# Altium PCB Relay PCB.PcbDoc
Units mm, origin at the board's own origin, x right, y up, seen from the top; angles counter-clockwise.
Board outline 141.46 x 161 mm, 4 copper layers (Top Layer, Signal Layer 1, Signal Layer 2, Bottom Layer), stack 0.778 mm thick; 27 components, 20 nets, 111 pads, 0 vias.
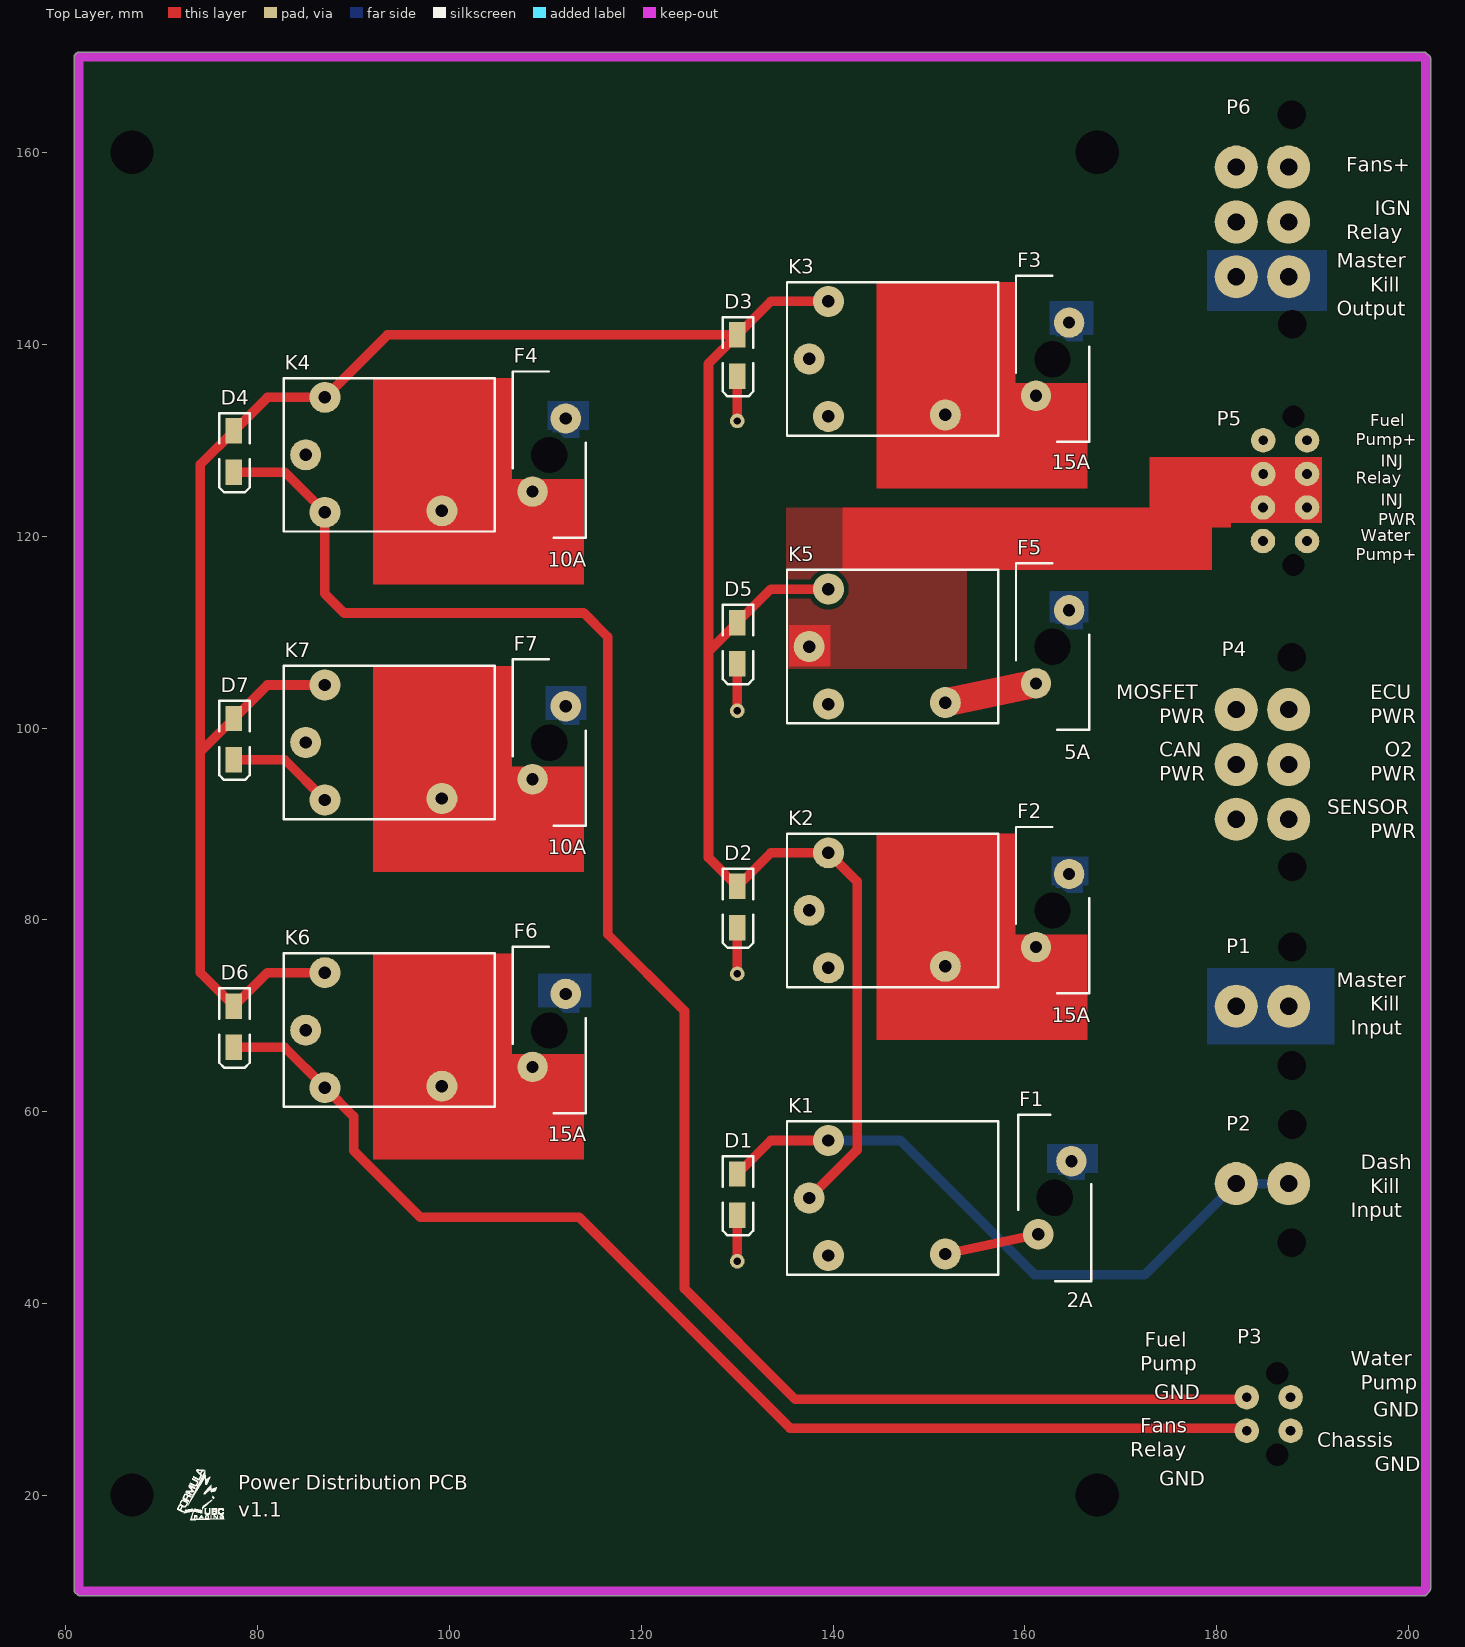
[diagram p0: Top Layer view]
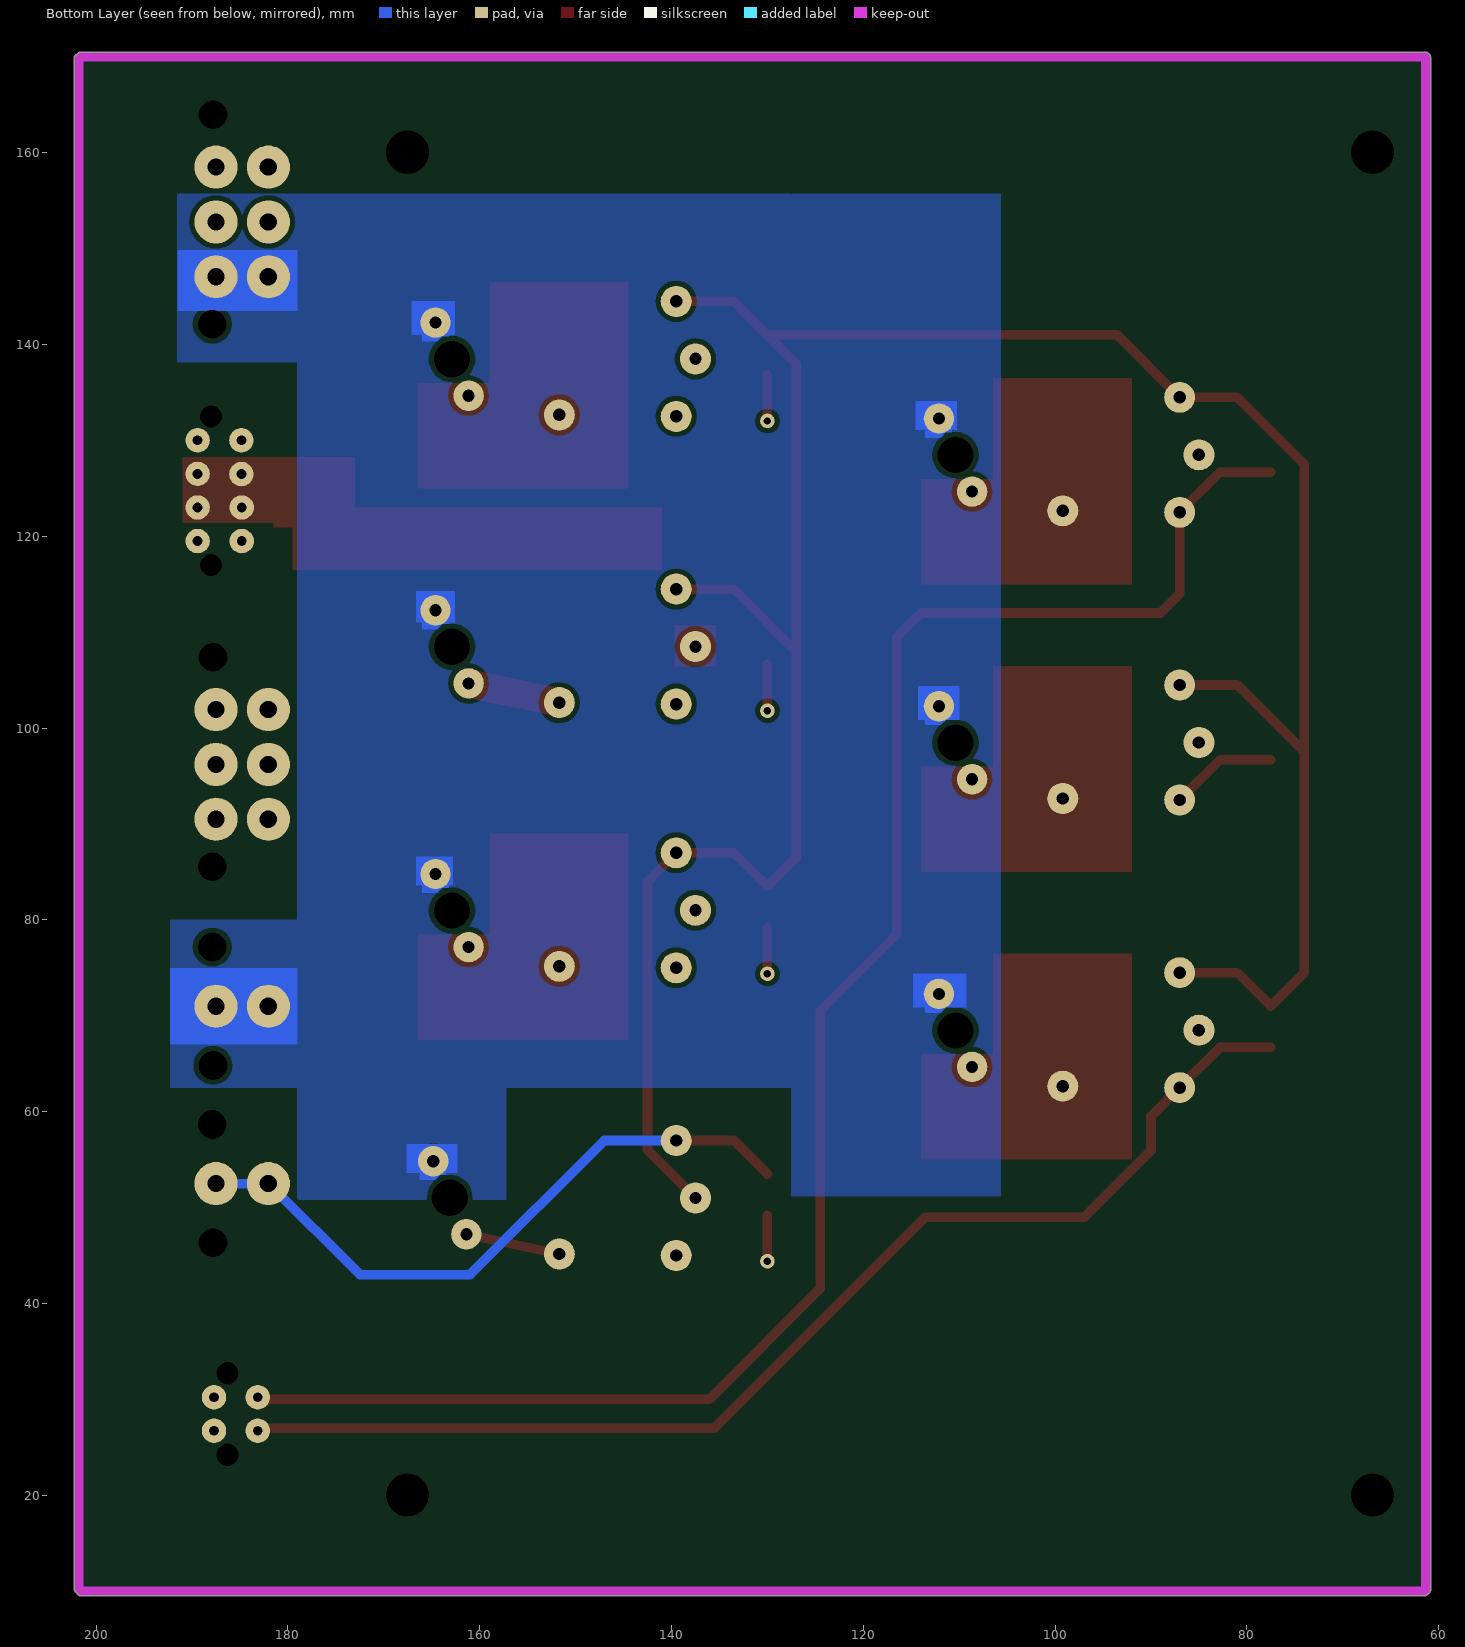
[diagram p1: Bottom Layer view, seen from below]
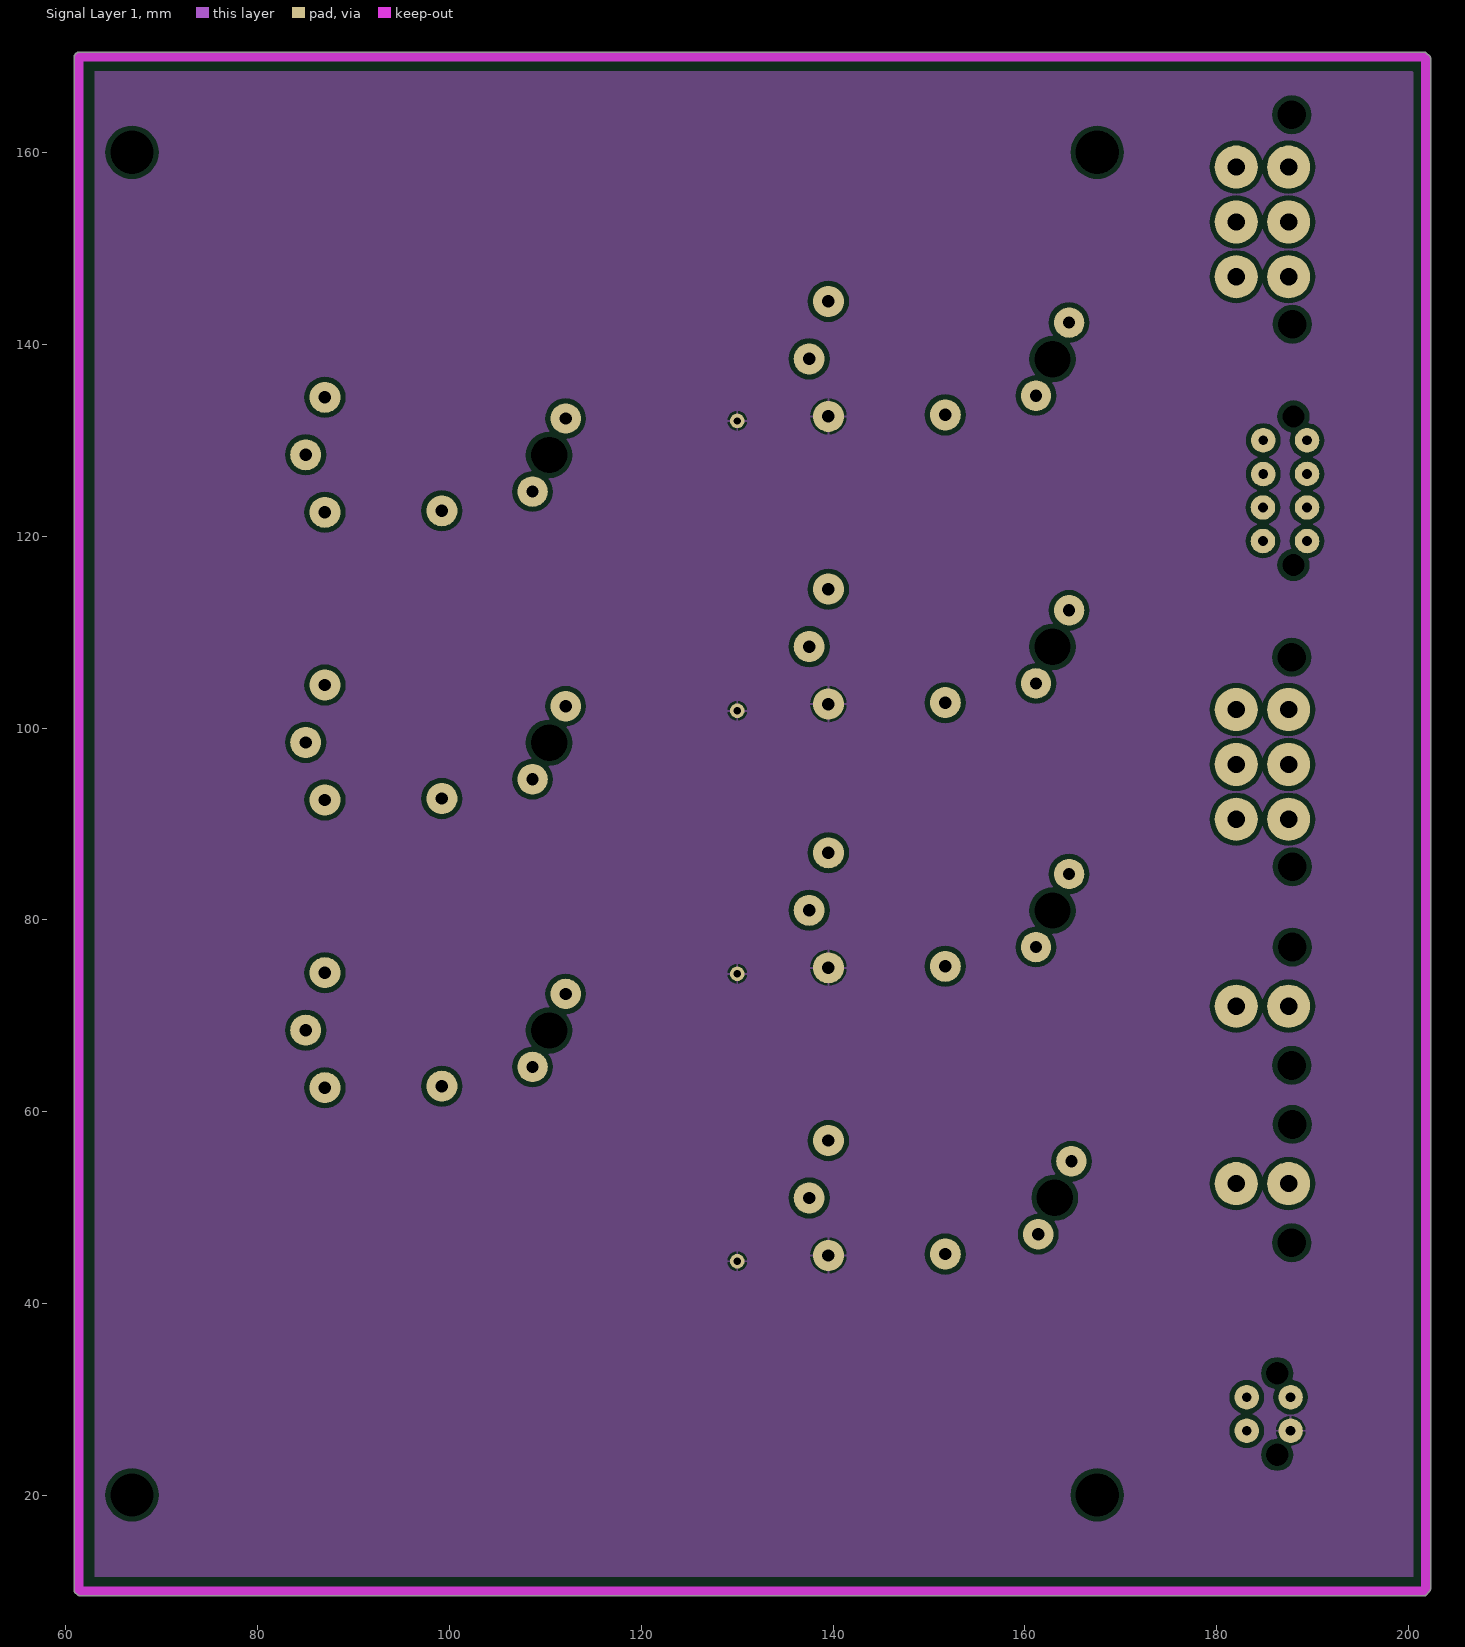
[diagram p2: Signal Layer 1]
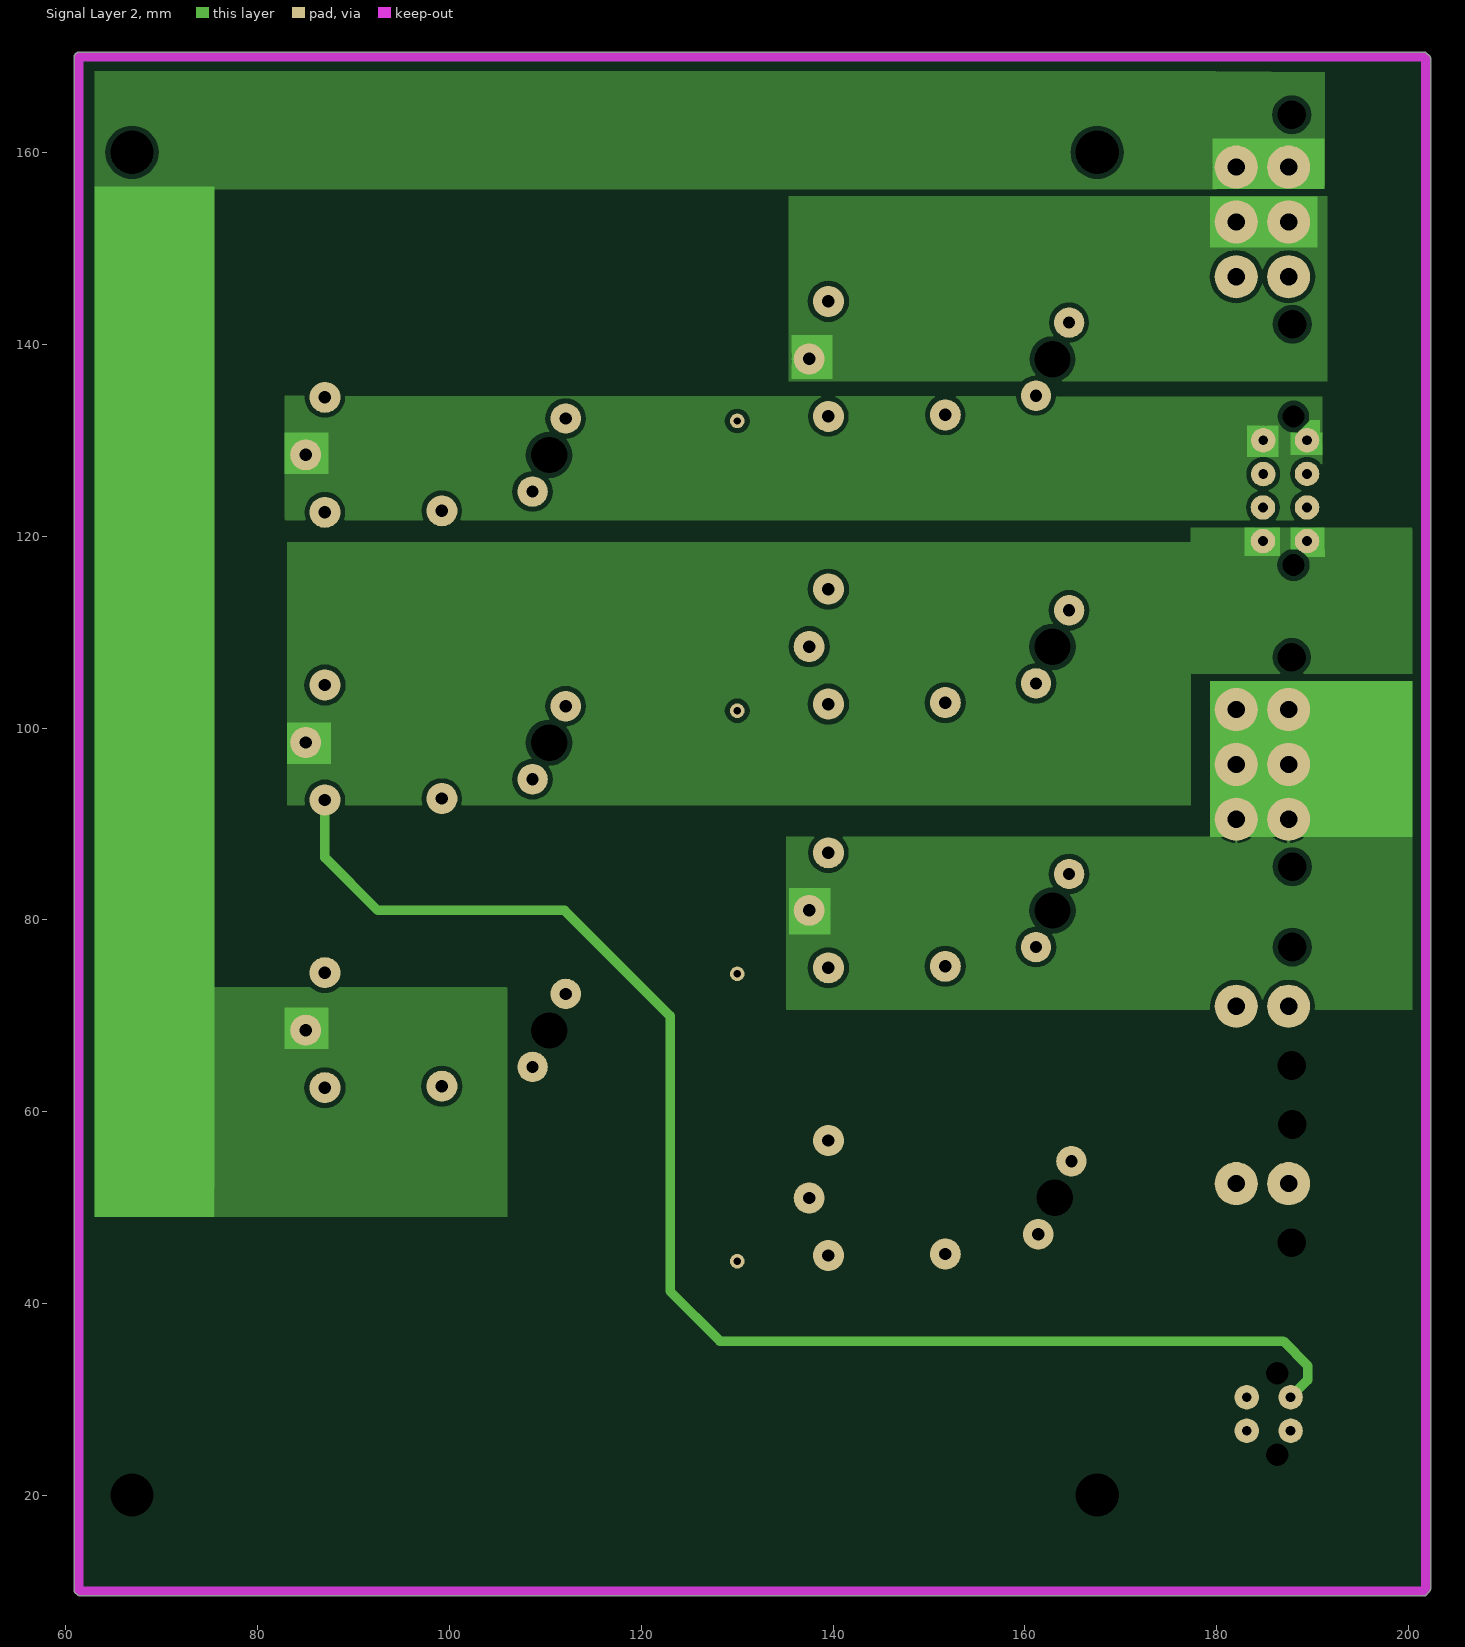
[diagram p3: Signal Layer 2]
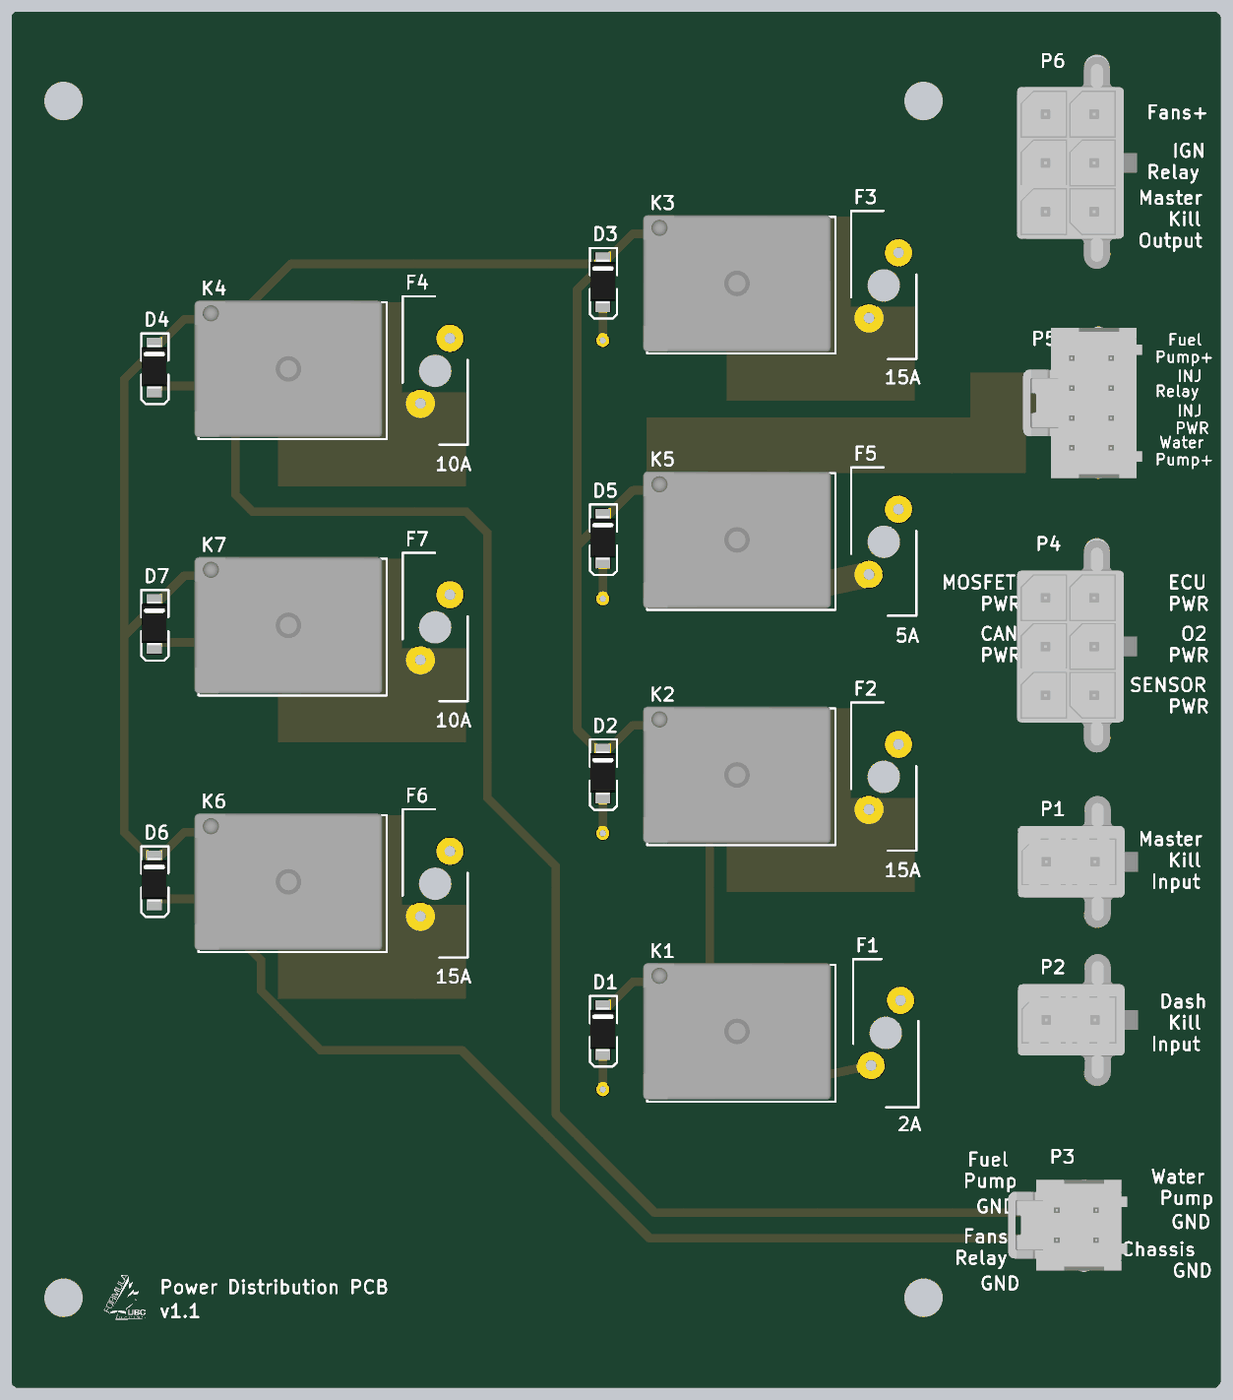
[diagram p4: 3D render of the assembled board from above, using the file's embedded part models]

## Layer stack, top to bottom
Top Solder: solder mask 0.0102, Solder Resist, Dk 3.5
Top Layer: signal copper 0.0356
Dielectric 1: core 0.254, FR-4, Dk 4.2
Signal Layer 1: signal copper 0.036
Dielectric 3: prepreg 0.127, Dk 4.2
Signal Layer 2: signal copper 0.036
Dielectric 2: core 0.254, Dk 4.2
Bottom Layer: signal copper 0.0356
Bottom Solder: solder mask 0.0102, Solder Resist, Dk 3.5

## Board outline
60.841,10.16 60.841,169.926 cw(c61.341,169.926) 61.026,170.315 cw(c61.415,170) 61.415,170.5 201.549,170.5 cw(c201.549,170) 201.97,170.271 cw(c201.803,169.799) 202.303,169.799 202.303,10.287 cw(c201.803,10.287) 202.022,9.837 cw(c201.549,10) 201.549,9.5 61.549,9.5 cw(c61.549,10) 61.151,9.697 cw(c61.341,10.16)

## Design rules (kind name [scope] priority, off if disabled: settings)
Clearance [All] p1: gap=0.254 except(0.508: Poly-Poly SMDPad-Poly Track-Poly Via-Poly Arc-Poly Fill-Poly THPad-Poly)
HoleSize [All] p1: absolutevalues=TRUE maxlimit=5 minlimit=0.025 maxpercent=80.000 minpercent=20.000
PolygonConnect [All] p1: connectstyle=Relief reliefconductorwidth=0.254 reliefentries=4 polygonreliefangle="90 Angle" airgapwidth=0.254
RoutingVias [All] p1: holewidth=0.711 width=1.27 viastyle="Through Hole" minholewidth=0.711 minwidth=1.27 maxholewidth=0.711 maxwidth=1.27
SolderMaskExpansion [All] p1: expansion=0.102
UnpouredPolygon [All] p1: allowunpoured=FALSE
Width [All] p1: maxlimit=16 minlimit=1 preferedwidth=1
28 further rules are at their usual default settings.

## Components (designator, comment, footprint, x,y, rotation, side; value= is the part's Value field where it differs from the comment)
D1 "" S1GDIODE 129.125,52.175 r270 top
D2 "" S1GDIODE 129.125,82.175 r270 top
D3 "" S1GDIODE 129.125,139.675 r270 top
D4 "" S1GDIODE 76.625,129.675 r270 top
D5 "" S1GDIODE 129.125,109.675 r270 top
D6 "" S1GDIODE 76.625,69.675 r270 top
D7 "" S1GDIODE 76.625,99.675 r270 top
F1 "2A" FUSEHOLDERV2 163.5,51 r0 top
F2 "15A" FUSEHOLDERV2 162.5,81 r180 top
F3 "15A" FUSEHOLDERV2 162.5,138.5 r180 top
F4 "10A" FUSEHOLDERV2 110,128.5 r180 top
F5 "5A" FUSEHOLDERV2 162.5,108.5 r180 top
F6 "15A" FUSEHOLDERV2 110,68.5 r180 top
F7 "10A" FUSEHOLDERV2 110,98.5 r180 top
K1 "MAIN RELAY" SPSTRELAYV2 141.894,51.076 r0 top
K2 "" SPSTRELAYV2 141.894,81.076 r0 top
K3 "" SPSTRELAYV2 141.894,138.576 r0 top
K4 "" SPSTRELAYV2 89.394,128.576 r0 top
K5 "" SPSTRELAYV2 141.894,108.576 r0 top
K6 "" SPSTRELAYV2 89.394,68.576 r0 top
K7 "" SPSTRELAYV2 89.394,98.576 r0 top
P1 "Relay Input Connector 1" 2PINCONNECTORV1 184.96,85.986 r270 top
P2 "Relay Input Connector 2" 2PINCONNECTORV1 184.96,67.486 r270 top
P3 "Relay Input Connector 3" 4PINULTRA 183.134,26.726 r90 top
P4 "Relay Output Connector (Mega)" 6PINCONNECTORV1 184.96,116.916 r270 top
P5 "Relay Output Connector (Ultra)" 8PINULTRA 189.42,119.506 r90 top
P6 "Relay Output Connector (Mega)" 6PINCONNECTORV1 184.96,173.486 r270 top

## Footprints (in the part's own frame and the unit in brackets; to place one, negate y for a bottom-side part, rotate by r counter-clockwise, add the part's x,y. Pads: shape width x height; smd on the part's side, far side on the other; paste and mask are expansions set on the pad)
2PINCONNECTORV1 [mm]
  round 4.5 hole 1.8: 1(14.986,2.54) 2(14.986,-2.921)
  round 0 hole 3: ""(8.816,2.921) ""(21.156,2.865)
  body extent 7.24,-6.38 22.63,7.65, height 15.15
4PINULTRA [mm]
  round 2.55 hole 1.02: 1(3.5,-4.572) 2(3.5,0) 3(0,-4.572) 4(0,0)
  round 0 hole 2.3: ""(-2.5,-3.175) ""(6,-3.175)
  body extent -3.49,-8.23 7.11,5.69, height 14.1
6PINCONNECTORV1 [mm]
  round 4.5 hole 1.8: 1(14.986,2.54) 2(14.986,-2.921) 3(20.701,2.54) 4(20.701,-2.921) 5(26.416,2.54) 6(26.416,-2.921)
  round 0 hole 3: ""(9.525,2.865) ""(31.369,2.921)
  body extent 8.29,-6.48 33.08,7.56, height 15.13
8PINULTRA [mm]
  round 2.55 hole 1.02: 1(0,0) 2(0,4.6) 3(3.5,0) 4(3.5,4.6) 5(7,0) 6(6.985,4.572) 7(10.5,0) 8(10.5,4.572)
  round 0 hole 2.3: ""(-2.5,1.42) ""(12.994,1.42)
  body extent -3.59,-3.68 14.01,10.23, height 13.1
FUSEHOLDERV2 [mil]
  round 125 hole 50: 1(53,151) 2(-83,-149)
  round 0 hole 149.02: ""(-15,1)
  silkscreen extent -165,-342 135,341, body extent -180,-340 140,340, height 502
S1GDIODE [mm] "Flyback diode"
  rect 2.65x1.75 smd: 1(2.975,0.875) 2(-1.325,0.875)
  silkscreen extent -3.18,-0.64 5.08,2.54, body extent -1.91,-0.57 3.37,2.35, height 2.41
SPSTRELAYV2 [mil]
  round 127.46 hole 51: 1(-173,-3) 2(386,-232.99) 3(-94,-239) 4(-94,233)
  silkscreen extent -264,-318 603,312, body extent -283,-310 583,320, height 630

## Part data
D1 D2 D3 D4 D5 D6 D7: library part Diode, "Default Diode"
F1 F2 F3 F4 F5 F6 F7: library part "Fuse 2", "Fuse"
K1 K2 K3 K4 K5 K6 K7: library part Relay-SPST, "Single-Pole Single-Throw Relay"
P1 P2: library part "Header 2", "Header, 2-Pin"
P3: library part "Header 4", "Header, 4-Pin"
P4 P6: library part "Header 6", "Header, 6-Pin"
P5: library part "Header 8", "Header, 8-Pin"

## Free pads (board coordinates)
  round 1.524 hole 0.762: 2(130,44.402) 2(130,74.374) 2(130,101.806) 2(130,132.032)
  round 0 hole 4.5: ""(66.888,20.044) ""(66.888,160.044) ""(167.538,20.044) ""(167.538,160.044)

## Nets (pads, with @x,y where several pads share a name; then routed paths per layer and width w, separated by ;. In a path a pad name is that pad's centre, name@x,y a point inside that pad or via, vN(x,y) a via of type N, cw(c..) or ccw(c..) an arc to the next point about the centre after c; other vN are vias at no path point)
"CHASSIS GND": D1.1 D2.1 D3.1 D5.1 K1.3 K2.3 K3.3 K5.3 P3.3 pad.2 | length 19.3
  Top Layer w1: pad.2@130,44.402 D1.1 ; pad.2@130,74.374 D2.1 ; pad.2@130,101.806 D5.1@130,106.632 ; pad.2@130,132.032 D3.1 D3.1@130,136.858
NetD1_2: D1.2 K1.4 P2.1 P2.2 | length 68.7
  Top Layer w1: D1.2 133.494,56.994 K1.4
  Bottom Layer w1: K1.4 147.006,56.994 161,43 172.5,43 P2.2@182.019,52.519 ; P2.2 P2.1
NetD2_2: D2.2 D3.2 D4.2 D5.2 D6.2 D7.2 K1.1 K2.4 K3.4 K4.4 K5.4 K6.4 K7.4 | length 282.8
  Top Layer w1: K6.4 80.994,74.494 D6.2 74,74.5 74,97.5 ; K7.4 80.994,104.494 74,97.5 ; K1.1 142.5,56 142.5,84.001 K2.4 133.494,86.994 D2.2 127,86.5 127,108 ; K5.4 133.494,114.494 127,108 ; K3.4 133.494,144.494 D3.2 ; 74,97.5 74,127.5 D4.2 80.994,134.494 K4.4 93.512,141 D3.2 ; 127,108 127,138 D3.2
NetD4_1: D4.1 K4.3 P3.2 | length 185.8
  Top Layer w1: D4.1 82.812,126.7 K4.3 87.007,113.993 89,112 114,112 116.5,109.5 116.5,78.5 124.5,70.5 124.5,41.547 136.047,30 P3.2@183.134,30
NetD6_1: D6.1 K6.3 P3.4 | length 124.2
  Top Layer w1: D6.1 82.812,66.7 K6.3 90,59.512 90,55.934 96.934,49 113.5,49 135.5,27 P3.4@183.134,27
NetD7_1: D7.1 K7.3 P3.1 | length 162.8
  Top Layer w1: D7.1 82.812,96.7 K7.3
  Signal Layer 2 w1: K7.3 87.007,86.507 92.513,81 112,81 123,70 123,41.273 128.205,36.068 186.944,36.068 189.484,33.528 189.484,32.004 P3.1
  Bottom Layer w1: P3.1 P3.1@187.706,30.48
NetF1_1: F1.1 F2.2 F3.2 F4.2 F5.2 F6.2 F7.2 P1.1 P1.2 P6.5 P6.6
NetF1_2: F1.2 K1.2 | length 9.9
  Top Layer w1: K1.2 F1.2
NetF2_1: F2.1 K2.2
NetF3_1: F3.1 K3.2
NetF4_1: F4.1 K4.2
NetF5_1: F5.1 K5.2 | length 10
  Top Layer w1: F5.1 F5.1@161.154,105.039
  Top Layer w3: K5.2 F5.1
NetF6_1: F6.1 K6.2
NetF7_1: F7.1 K7.2
NetK2_1: K2.1 P4.1 P4.2 P4.3 P4.4 P4.5 P4.6
NetK3_1: K3.1 P6.3 P6.4
NetK4_1: K4.1 P5.7 P5.8
NetK5_1: K5.1 P5.3 P5.4 P5.5 P5.6
NetK6_1: K6.1 P6.1 P6.2
NetK7_1: K7.1 P5.1 P5.2
pads on no net: F1. F2. F3. F4. F5. F6. F7. P1. P2. P3. P4. P5. P6.

## Polygon pours and split planes (outlines as drawn)
"CHASSIS GND" on Signal Layer 1 "Bottom Layer-No Net" (solid, pour order 18): 63,168.5 200.5,168.5 200.5,11.5 63,11.5
NetK6_1 on Signal Layer 2 "K6_1" (solid, pour order 26): 75.29,73 106,73 106,49.022 75.504,49.022
NetK7_1 on Signal Layer 2 "K7_1" (solid, pour order 25): 83.058,119.38 177.292,119.38 177.292,91.948 83.058,91.948
NetK2_1 on Signal Layer 2 "K2_1" (solid, pour order 27): 135.128,88.646 200.406,88.646 200.406,70.612 135.128,70.612
NetK4_1 on Signal Layer 2 "K4_1" (solid, remove dead copper, pour order 21): 82.804,134.684 82.804,121.666 191.008,121.666 191.008,134.57
NetK6_1 on Signal Layer 2 "K6_1" (solid, remove dead copper, pour order 20): 63,168.5 63,156.21 180,156.21 180,168.5
NetK6_1 on Signal Layer 2 "K6_1" (solid, remove dead copper, pour order 16): 180,168.5 180,156.5 191.226,156.5 191.516,156.21 191.262,156.464 191.262,168.402
NetK3_1 on Signal Layer 2 "K3_1" (solid, remove dead copper, pour order 17): 135.382,155.448 191.516,155.448 191.516,136.144 135.382,136.144
NetK7_1 on Signal Layer 2 "K7_1" (solid, remove dead copper, pour order 23): 177.292,120.904 200.406,120.904 200.406,105.664 177.292,105.664
NetF1_1 on Bottom Layer "F1_1" (solid, pour order 29): 179.043,155.702 157.207,155.702 157.207,50.8 179.043,50.8
NetF1_1 on Bottom Layer "F1_1" (solid, pour order 30): 127.5,155.702 105.664,155.702 105.664,51.181 127.5,51.181
NetF1_1 on Bottom Layer "F1_1" (solid, pour order 22): 179,62.484 127.5,62.484 127.5,155.702 179,155.702 179,146.25
NetF1_1 on Bottom Layer "F1_1" (solid, remove dead copper, pour order 19): 178.816,155.702 191.516,155.702 191.516,138.176 178.816,138.176
NetF1_1 on Bottom Layer "F1_1" (solid, remove dead copper, pour order 24): 178.562,80.01 192.278,80.01 192.278,62.484 178.562,62.484
NetK5_1 on Top Layer "K5_1" (solid, pour order 28): 135.128,123 153.924,123 153.924,106.172 135.128,106.172

## Keep-outs
Keep-Out Layer:
  lines w1: 61.341,10.16 61.341,169.926 ; 61.415,170 201.549,170 ; 61.549,10 201.549,10 ; 201.803,10.287 201.803,169.799

## Other copper
Top Layer:
  rectangle net NetF4_1: 92,114.984 114,125.984
  rectangle net NetK5_1: 135.382,106.426 139.7,110.744
  rectangle net NetF4_1: 92,125.984 106.5,136.5
  rectangle net NetF7_1: 92,90.5 106.5,106.5
  rectangle net NetF7_1: 92,85 114,96
  rectangle net NetF6_1: 92,55 114,66
  rectangle net NetF2_1: 144.5,67.5 166.5,78.5
  rectangle net NetF3_1: 144.5,125 166.5,136
  rectangle net NetF6_1: 92,60.5 106.5,76.5
  rectangle net NetF3_1: 144.5,130.5 159,146.5
  rectangle net NetF2_1: 144.5,73 159,89
  rectangle net NetK5_1: 141,116.5 179.5,123
  rectangle net NetK5_1: 173,120.904 181.5,128.27
  rectangle net NetK5_1: 181.5,121.412 191,128.27
Signal Layer 2:
  rectangle net NetK2_1: 135.382,78.486 139.7,83.312
  rectangle net NetK3_1: 135.636,136.398 139.954,140.97
  rectangle net NetK3_1: 179.324,150.114 190.5,155.448
  rectangle net NetK2_1: 179.324,88.646 200.406,104.902
  rectangle net NetK4_1: 183.134,128.27 186.436,131.572
  rectangle net NetK6_1: 82.804,66.548 87.376,70.866
  rectangle net NetK7_1: 83.058,96.266 87.63,100.584
  rectangle net NetK4_1: 82.804,126.492 87.376,130.81
  rectangle net NetK6_1: 63,49 75.5,156.5
  rectangle net NetK6_1: 179.535,156.21 191.226,161.471
  rectangle net NetK7_1: 182.88,117.932 186.615,120.904
  rectangle net NetK7_1: 187.706,118.618 191.262,120.904
  rectangle net NetK4_1: 187.706,128.475 191.008,130.835
  region net NetK4_1: 187.913,130.255 189.738,132.08 190.754,132.08 190.754,128.524 187.913,128.524
  region net NetK7_1: 189.432,117.843 188.658,118.618 191.262,118.618 191.262,117.856
Bottom Layer:
  rectangle net NetF1_1: 162.56,110.998 166.624,114.3
  rectangle net NetF1_1: 162.77,83.566 166.624,86.614
  rectangle net NetF1_1: 162.306,53.594 167.64,56.642
  rectangle net NetF1_1: 109.22,70.866 114.808,74.422
  rectangle net NetF1_1: 109.982,100.838 114.3,104.394
  rectangle net NetF1_1: 110.236,131.064 114.554,134.112
  rectangle net NetF1_1: 179,67 192.278,75
  rectangle net NetF1_1: 179,143.5 191.5,149.86
  rectangle net NetF1_1: 162.56,140.97 167.132,144.526
  region net NetF1_1: 110.753,130.85 111.385,130.85 111.933,130.302 113.538,130.302 113.538,131.826 110.744,131.826
  region net NetF1_1: 110.729,100.874 111.361,100.874 111.909,100.326 113.514,100.326 113.514,101.85 110.72,101.85
  region net NetF1_1: 110.729,70.874 111.361,70.874 111.909,70.326 113.514,70.326 113.514,71.85 110.72,71.85
  region net NetF1_1: 163.229,140.874 163.861,140.874 164.409,140.326 166.014,140.326 166.014,141.85 163.22,141.85
  region net NetF1_1: 163.229,110.874 163.861,110.874 164.409,110.326 166.014,110.326 166.014,111.85 163.22,111.85
  region net NetF1_1: 163.467,53.425 164.099,53.425 164.647,52.877 166.252,52.877 166.252,54.401 163.458,54.401
  region net NetF1_1: 163.229,83.374 163.861,83.374 164.409,82.826 166.014,82.826 166.014,84.35 163.22,84.35

## Silkscreen, mask and mechanical layers (free items; w line width, h text height)
Top Overlay:
  drawing of 4510 lines, arcs and shapes, not listed
  text "Fans+" at 193.5,158 h1.52
  text "IGN" at 196.5,153.5 h1.52
  text "Relay" at 193.5,151 h1.52
  text "Master" at 192.5,148 h1.52
  text "Kill" at 196,145.5 h1.52
  text "Output" at 192.5,143 h1.52
  text "Fuel" at 196,131.5 h1.27
  text "Pump+" at 194.5,129.5 h1.27
  text "INJ" at 197.104,127.254 h1.27
  text "15A" at 162.814,127 h1.52
  text "Relay" at 194.5,125.5 h1.27
  text "INJ" at 197.104,123.19 h1.27
  text "PWR" at 196.85,121.158 h1.27
  text "Water" at 195,119.5 h1.27
  text "Pump+" at 194.5,117.5 h1.27
  text "10A" at 110.236,116.84 h1.52
  text "MOSFET" at 169.5,103 h1.52
  text "ECU" at 196,103 h1.52
  text "PWR" at 174,100.5 h1.52
  text "PWR" at 196,100.5 h1.52
  text "CAN" at 174,97 h1.52
  text "O2" at 197.5,97 h1.52
  text "5A" at 164.084,96.774 h1.52
  text "PWR" at 174,94.5 h1.52
  text "PWR" at 196,94.5 h1.52
  text "SENSOR" at 191.5,91 h1.52
  text "PWR" at 196,88.5 h1.52
  text "10A" at 110.236,86.868 h1.52
  text "Master" at 192.5,73 h1.52
  text "Kill" at 196,70.5 h1.52
  text "15A" at 162.814,69.342 h1.52
  text "Input" at 194,68 h1.52
  text "15A" at 110.236,56.896 h1.52
  text "Dash" at 195,54 h1.52
  text "Kill" at 196,51.5 h1.52
  text "Input" at 194,49 h1.52
  text "2A" at 164.338,39.624 h1.52
  text "Fuel" at 172.5,35.5 h1.52
  text "Water" at 194,33.5 h1.52
  text "Pump" at 172,33 h1.52
  text "Pump" at 195,31 h1.52
  text "GND" at 173.5,30 h1.52
  text "GND" at 196.342,28.194 h1.52
  text "Fans" at 172,26.5 h1.52
  text "Chassis" at 190.5,25 h1.52
  text "Relay" at 171,24 h1.52
  text "GND" at 196.5,22.5 h1.52
  text "GND" at 174,21 h1.52
  text "Power Distribution PCB" at 77.978,20.574 h1.52
  text "v1.1" at 77.978,17.78 h1.52